# Altium PCB Motherboard_Cube.PcbDoc
Units mil, origin at the board's own origin, x right, y up, seen from the top; angles counter-clockwise.
Board outline 1180 x 1180 mil, 2 copper layers (Top Layer, Bottom Layer); 27 components, 51 nets, 176 pads, 93 vias.
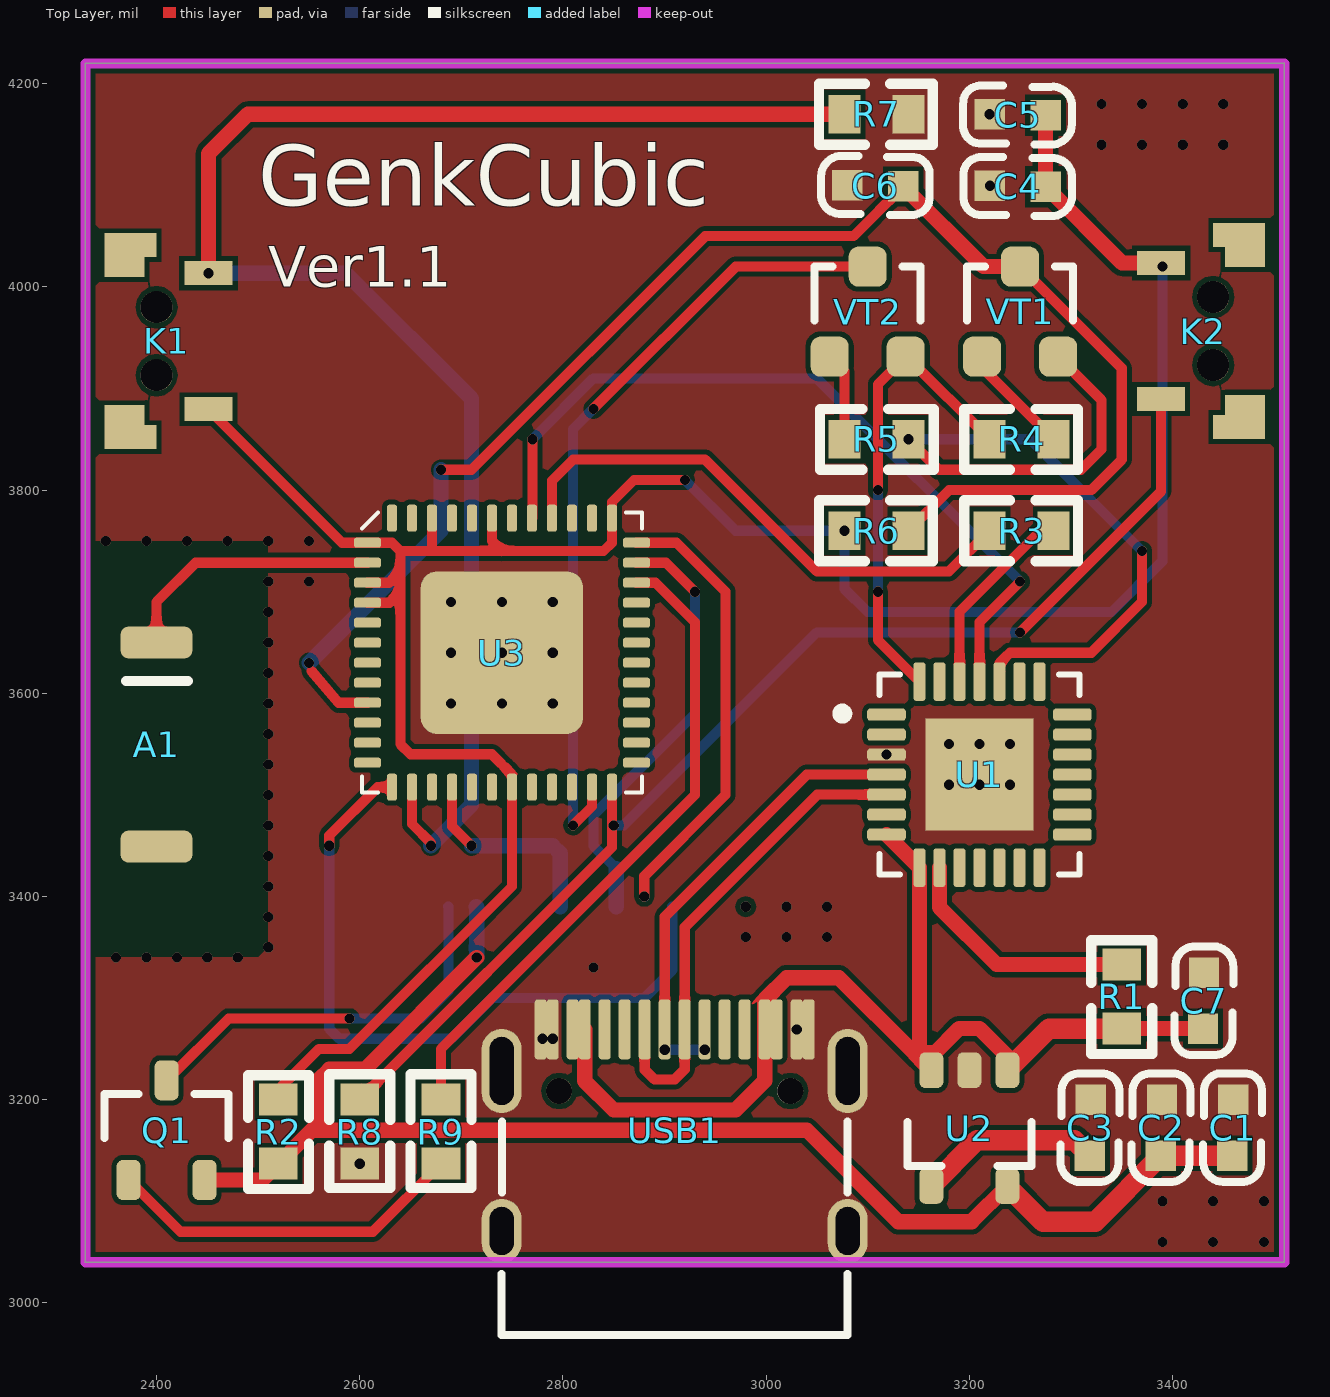
[diagram p0: Top Layer view]
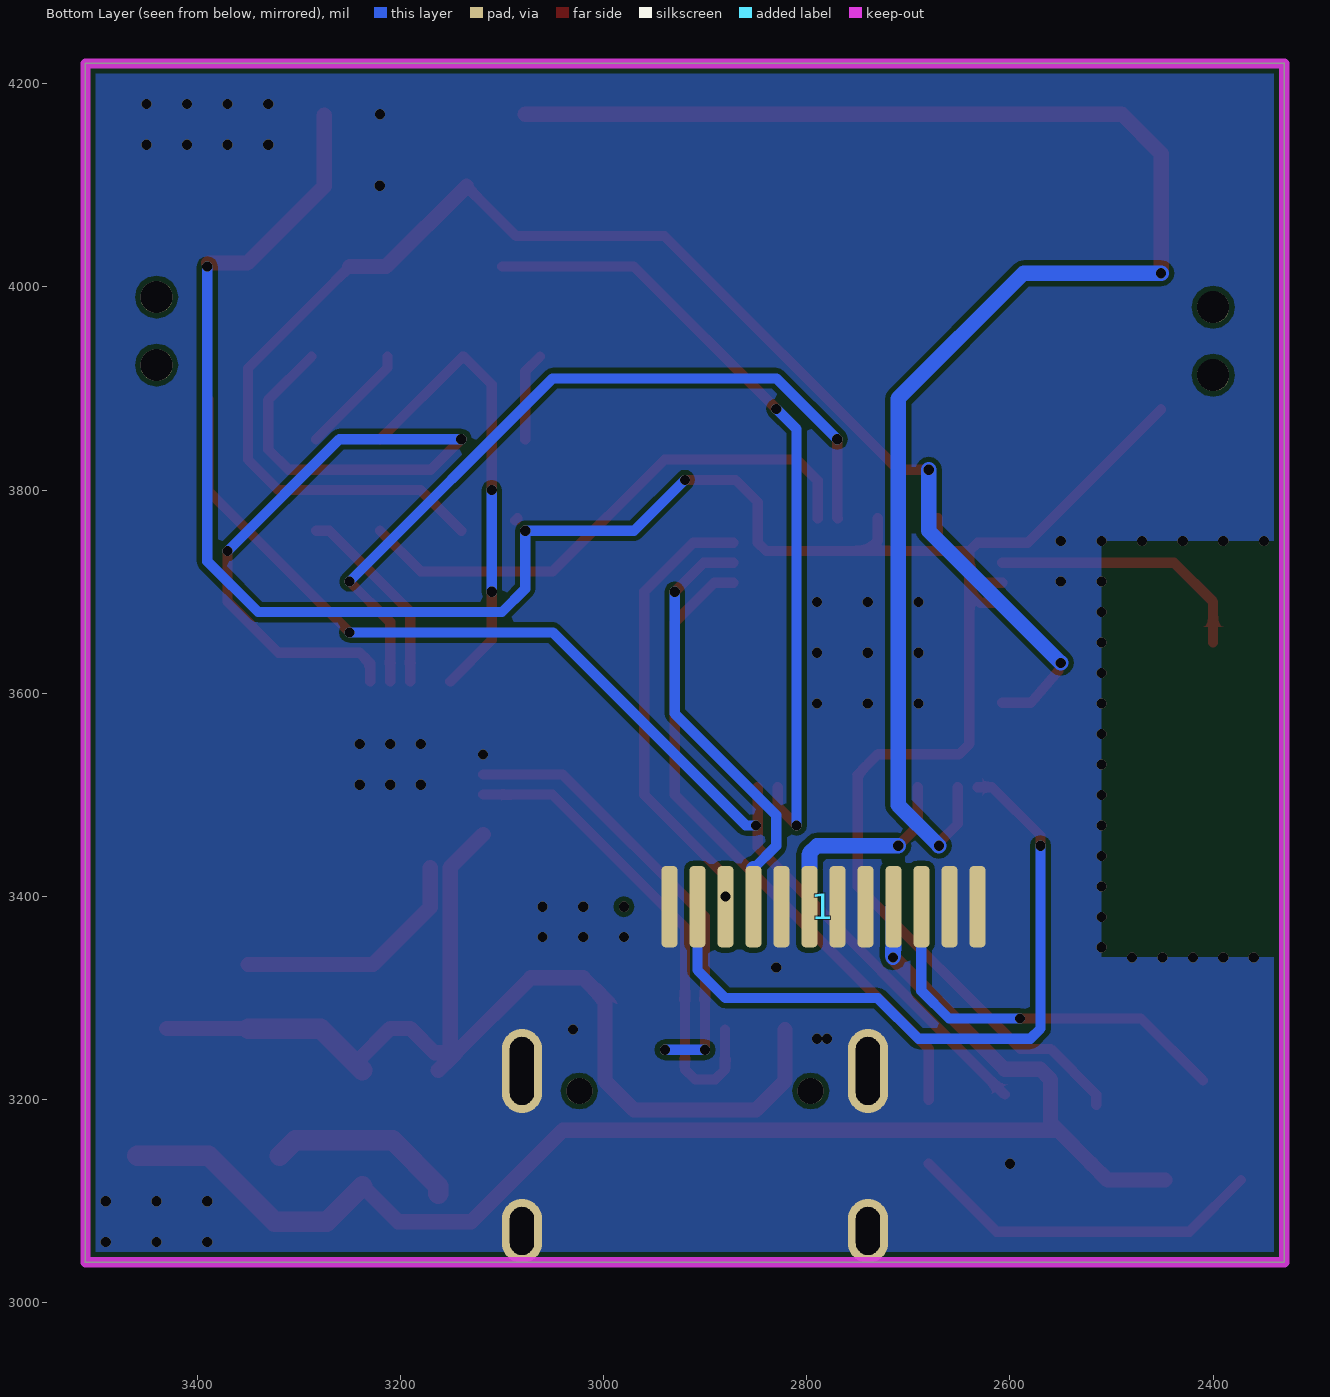
[diagram p1: Bottom Layer view, seen from below]
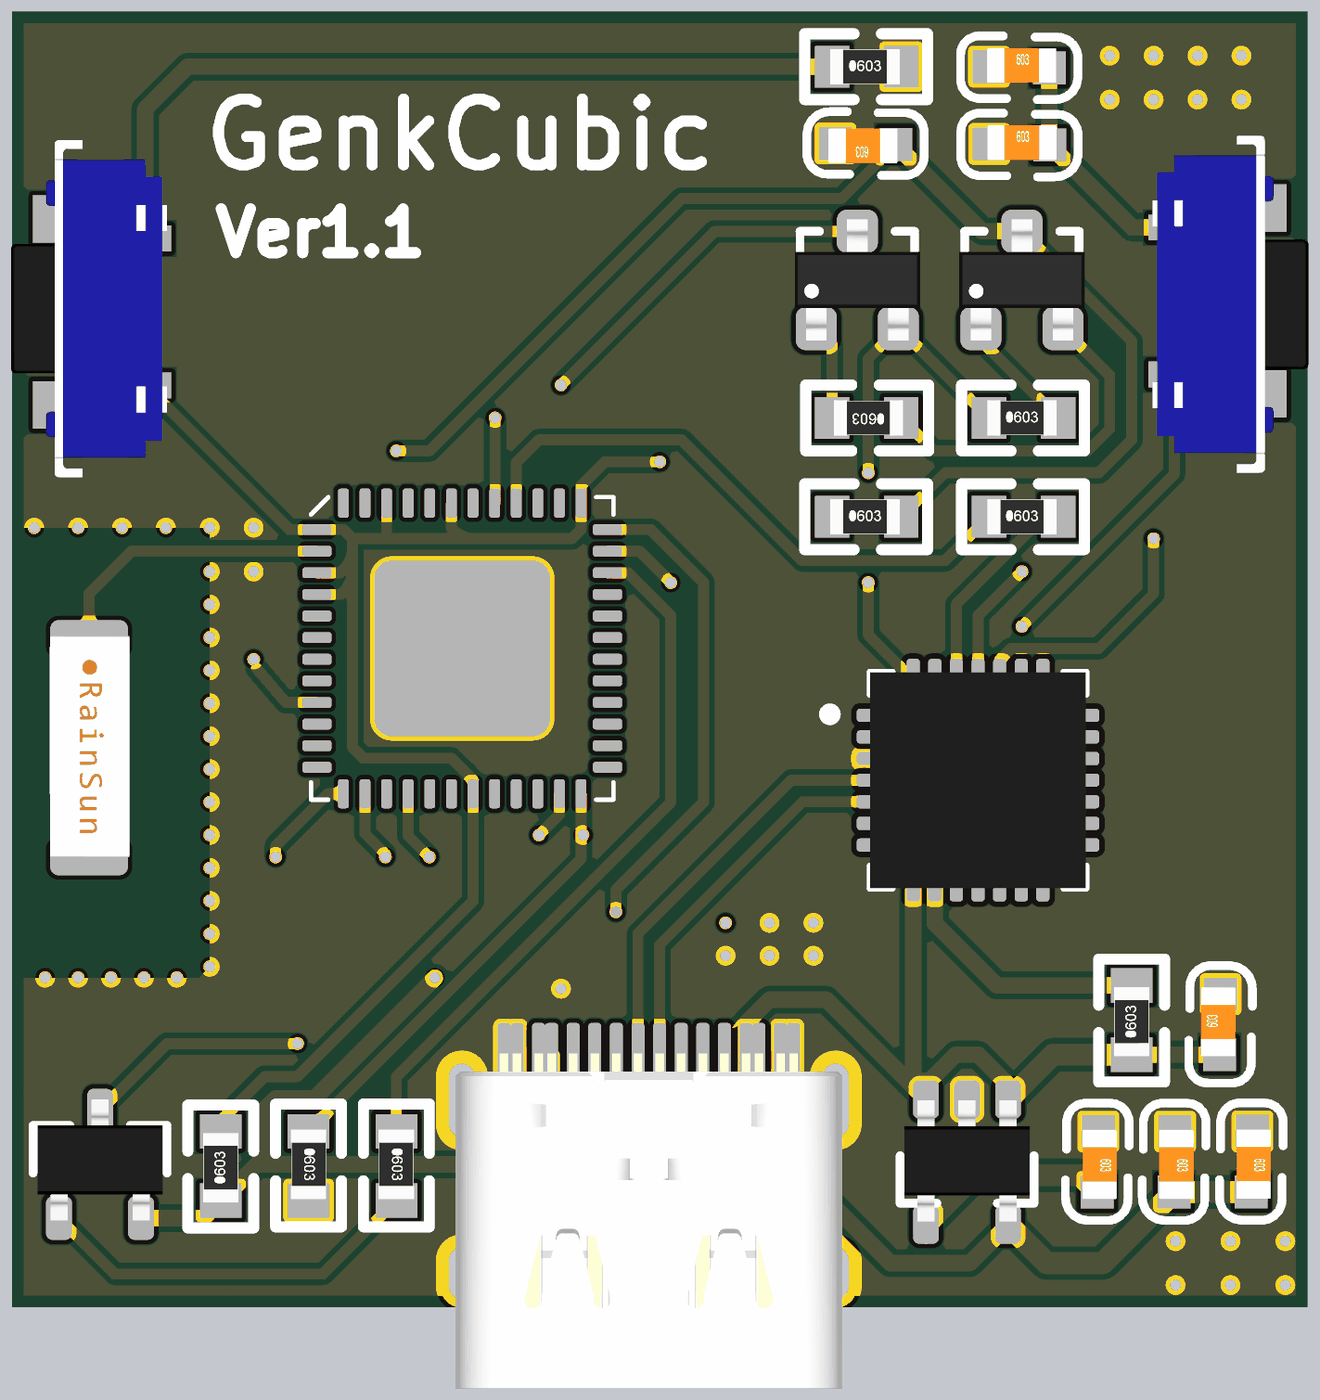
[diagram p2: 3D render of the assembled board from above, using the file's embedded part models]

## Layer stack, top to bottom
Top Solder: solder mask 0.4, Solder Resist, Dk 3.5
Top Layer: signal copper 1.4
Dielectric 1: dielectric 12.6, FR-4, Dk 4.8
Bottom Layer: signal copper 1.4
Bottom Solder: solder mask 0.4, Solder Resist, Dk 3.5

## Board outline
2330,3040 2330,4220 3510,4220 3510,3040

## Design rules (kind name [scope] priority, off if disabled: settings)
Clearance Clearance_12 [InNamedPolygon('Top Layer-No Net') Or  InNamedPolygon('Top Layer-No Net1')] p1: gap=5 ignorepadtopadclearanceinfootprint=FALSE
Clearance Clearance_11 [InNamedPolygon('Top Layer-No Net') Or  InNamedPolygon('Top Layer-No Net1')] p2: gap=5 ignorepadtopadclearanceinfootprint=FALSE
Clearance Clearance_10 [InNamedPolygon('Top Layer-No Net1') Or  InNamedPolygon('Top Layer-No Net')] p3: gap=5 ignorepadtopadclearanceinfootprint=FALSE
Clearance Clearance_9 [InNamedPolygon('Top Layer-No Net') Or  InNamedPolygon('Top Layer-No Net1')] p4: gap=10 ignorepadtopadclearanceinfootprint=FALSE except(0: Arc-Hole Track-Hole SMDPad-Hole THPad-Hole Via-Hole Fill-Hole Poly-Hole Region-Hole Text-Hole)
Clearance Clearance_8 [InNamedPolygon('Top Layer-No Net') Or  InNamedPolygon('Top Layer-No Net1')] p5: gap=10 ignorepadtopadclearanceinfootprint=FALSE except(0: Arc-Hole Track-Hole SMDPad-Hole THPad-Hole Via-Hole Fill-Hole Poly-Hole Region-Hole Text-Hole)
Clearance Clearance_7 [InNamedPolygon('Top Layer-No Net') Or  InNamedPolygon('Top Layer-No Net1')] p6: gap=10 ignorepadtopadclearanceinfootprint=FALSE except(0: Arc-Hole Track-Hole SMDPad-Hole THPad-Hole Via-Hole Fill-Hole Poly-Hole Region-Hole Text-Hole)
Clearance Clearance_6 [InNamedPolygon('Top Layer-No Net1') Or  InNamedPolygon('Top Layer-No Net')] p7: gap=10 ignorepadtopadclearanceinfootprint=FALSE except(0: Arc-Hole Track-Hole SMDPad-Hole THPad-Hole Via-Hole Fill-Hole Poly-Hole Region-Hole Text-Hole)
Clearance Clearance_5 [InNamedPolygon('Top Layer-No Net') Or  InNamedPolygon('Top Layer-No Net1')] p8: gap=10 ignorepadtopadclearanceinfootprint=FALSE except(0: Arc-Hole Track-Hole SMDPad-Hole THPad-Hole Via-Hole Fill-Hole Poly-Hole Region-Hole Text-Hole)
Clearance Clearance_4 [InNamedPolygon('Top Layer-No Net1') Or  InNamedPolygon('Top Layer-No Net')] p9: gap=5 ignorepadtopadclearanceinfootprint=FALSE
Clearance Clearance_3 [InNamedPolygon('Top Layer-No Net')] p10: gap=10 ignorepadtopadclearanceinfootprint=FALSE except(0: Arc-Hole Track-Hole SMDPad-Hole THPad-Hole Via-Hole Fill-Hole Poly-Hole Region-Hole Text-Hole)
Clearance Clearance_2 [InNamedPolygon('Top Layer-No Net1')] p11: gap=10 ignorepadtopadclearanceinfootprint=FALSE except(0: Arc-Hole Track-Hole SMDPad-Hole THPad-Hole Via-Hole Fill-Hole Poly-Hole Region-Hole Text-Hole)
Clearance Clearance_1 [InNamedPolygon('Top Layer-No Net')] p12: gap=5 ignorepadtopadclearanceinfootprint=FALSE
Clearance [All] p13: gap=0 ignorepadtopadclearanceinfootprint=FALSE
PolygonConnect PolygonConnect_6 [All vs IsNamedPolygon('Top Layer-No Net') Or  IsNamedPolygon('Top Layer-No Net1')] p1: connectstyle=Direct reliefconductorwidth=10 reliefentries=4 polygonreliefangle="90 Angle" airgapwidth=10
PolygonConnect PolygonConnect_5 [All vs IsNamedPolygon('Top Layer-No Net') Or  IsNamedPolygon('Top Layer-No Net1')] p2: connectstyle=Direct reliefconductorwidth=10 reliefentries=4 polygonreliefangle="90 Angle" airgapwidth=10
PolygonConnect PolygonConnect_4 [All vs IsNamedPolygon('Top Layer-No Net1') Or  IsNamedPolygon('Top Layer-No Net')] p3: connectstyle=Direct reliefconductorwidth=10 reliefentries=4 polygonreliefangle="90 Angle" airgapwidth=10
PolygonConnect PolygonConnect_3 [All vs IsNamedPolygon('Top Layer-No Net') Or  IsNamedPolygon('Top Layer-No Net1')] p4: thpad.connectstyle=Direct thpad.reliefconductorwidth=10 thpad.reliefentries=4 thpad.polygonreliefangle="90 Angle" thpad.airgapwidth=10 smdpad.connectstyle=Relief smdpad.reliefconductorwidth=10 smdpad.reliefentries=4 smdpad.polygonreliefangle="90 Angle" smdpad.airgapwidth=10 via.connectstyle=Relief via.reliefconductorwidth=10 via.reliefentries=4 via.polygonreliefangle="90 Angle" via.airgapwidth=10
PolygonConnect PolygonConnect_2 [All vs IsNamedPolygon('Top Layer-No Net') Or  IsNamedPolygon('Top Layer-No Net1')] p5: connectstyle=Relief reliefconductorwidth=10 reliefentries=4 polygonreliefangle="90 Angle" airgapwidth=10
PolygonConnect PolygonConnect_1 [All vs IsNamedPolygon('Top Layer-No Net1') Or  IsNamedPolygon('Top Layer-No Net')] p6: connectstyle=Relief reliefconductorwidth=10 reliefentries=4 polygonreliefangle="90 Angle" airgapwidth=10
PolygonConnect [All] p7: connectstyle=Relief reliefconductorwidth=10 reliefentries=4 polygonreliefangle="90 Angle" airgapwidth=10
RoutingVias [All] p1: holewidth=28 width=50 viastyle="Through Hole" minholewidth=28 minwidth=50 maxholewidth=28 maxwidth=50
SolderMaskExpansion [All] p1: expansion=4
UnRoutedNet [All] p1: checkbadconnections=TRUE
Width [All] p1: maxlimit=30 minlimit=1 preferedwidth=15
29 further rules are at their usual default settings.

## Components (designator, comment, footprint, x,y, rotation, side; value= is the part's Value field where it differs from the comment)
1 "LCD-240x240" LCD-240X240-NOHOLE 2913.97,3597 r180 bottom
A1 "RAINSUN" ANT-Rainsun-AN5120 2400,3550 r270 top
C1 "0.1uF" 0603C 3460.35,3200.21 r270 top value=0.1u
C2 "10uF" 0603C 3390,3200 r270 top value=0.1u
C3 "10nF" 0603C 3320,3200 r270 top value=0.1u
C4 "10uF" 0603C 3220,4100 r0 top value=0.1u
C5 "0.1uF" 0603C 3219.79,4170.35 r0 top value=0.1u
C6 "0.1uF" 0603C 3135.21,4098.65 r180 top value=0.1u
C7 "1uF" 0603C 3429.65,3269.79 r90 top value=0.1u
K1 "KEY_LEFT" SMD-SW2X4 2400,3913.07 r90 top
K2 "KEY_RIGHT" SMD-SW2X4 3440,3990 r270 top
Q1 "AO3415A" SOT23-3 2410,3170 r90 top
R1 "10K" 0603R 3350,3270 r90 top value=22R
R2 "0R" 0603R 2520,3137.01 r90 top value=22R
R3 "200R" 0603R 3220,3760 r0 top value=22R
R4 "12K" 0603R 3220,3850 r0 top value=22R
R5 "12K" 0603R 3140,3850 r180 top value=22R
R6 "10K" 0603R 3077.01,3760 r0 top value=22R
R7 "10K" 0603R 3077.01,4170 r0 top value=22R
R8 "10K" 0603R 2600,3200 r270 top value=22R
R9 "1K" 0603R 2680,3200 r270 top value=22R
U1 "CP2102" QFN-28 3210,3520 r0 top value=Value
U2 "LP2992 3V3" SOT23-5 3200,3170 r270 top
U3 "ESP32_SIP" QFN-48_7X7 2740,3640 r0 top
USB1 "Type-C" Type-C-TOP 2910,3170 r270 top
VT1 "S8050" SMT_TRIODE_NPN 3250,3975.71 r0 top
VT2 "S8050" SMT_TRIODE_NPN 3100,3975.71 r0 top

## Footprints (in the part's own frame and the unit in brackets; to place one, negate y for a bottom-side part, rotate by r counter-clockwise, add the part's x,y. Pads: shape width x height; smd on the part's side, far side on the other; paste and mask are expansions set on the pad)
0603C [mil]
  rect 30x30 smd: 1(0.21,-0.35) 2(55.21,-1.35)
  silkscreen extent -26,-30 81,28, body extent -1,-15 62,17, height 12
0603R [mm]
  rect 0.8x0.965 smd: 1(0,0) 2(1.6,0)
  silkscreen extent -0.64,-0.76 2.21,0.76, body extent -0.04,-0.41 1.56,0.41, height 0.45
ANT-Rainsun-AN5120 [mm] "选择焊盘"
  rrect50% 0.8x1.8 smd: 1(-2.54,0) ""(2.563,0)
  silkscreen extent -1.57,-0.76 -1.57,0.79, body extent -2.57,-0.91 2.54,0.94, height 1.32
LCD-240X240-NOHOLE [mil]
  rrect50% 15.75x80 smd: 1(282,-207) 2(254.44,-207) 3(226.88,-207) 4(199.32,-207) 5(171.76,-207) 6(144.2,-207) 7(116.65,-207) 8(89.09,-207) 9(61.53,-207) 10(33.97,-207) 11(6.41,-207) 12(-21.15,-207)
QFN-28 [mil]
  rrect50% 38x12 smd mask+5: 1(-91.5,59.06) 2(-91.5,39.37) 3(-91.5,19.68) 4(-91.5,0) 5(-91.5,-19.68) 6(-91.5,-39.37) 7(-91.5,-59.06) 15(91.5,-59.06) 16(91.5,-39.37) 17(91.5,-19.68) 18(91.5,0) 19(91.5,19.68) 20(91.5,39.37) 21(91.5,59.06)
  rrect50% 12x38 smd mask+5: 8(-59.06,-91.5) 9(-39.37,-91.5) 10(-19.68,-91.5) 11(0,-91.5) 12(19.68,-91.5) 13(39.37,-91.5) 14(59.06,-91.5) 22(59.06,91.5) 23(39.37,91.5) 24(19.68,91.5) 25(0,91.5) 26(-19.68,91.5) 27(-39.37,91.5) 28(-59.06,91.5)
  rect 106.3x110.24 smd: 29(0,0)
  silkscreen extent -140,-98 98,98, body extent -98,-98 98,98, height 35
QFN-48_7X7 [mm]
  rrect20% 4.064x4.064 smd: 0(0,0)
  rrect50% 0.675x0.25 smd: 1(-3.363,2.75) 2(-3.363,2.25) 3(-3.363,1.75) 4(-3.363,1.25) 5(-3.363,0.75) 6(-3.363,0.25) 7(-3.363,-0.25) 8(-3.363,-0.75) 9(-3.363,-1.25) 10(-3.363,-1.75) 11(-3.363,-2.25) 12(-3.363,-2.75) 25(3.363,-2.75) 26(3.363,-2.25) 27(3.363,-1.75) 28(3.363,-1.25) 29(3.363,-0.75) 30(3.363,-0.25) 31(3.363,0.25) 32(3.363,0.75) 33(3.363,1.25) 34(3.363,1.75) 35(3.363,2.25) 36(3.363,2.75)
  rrect50% 0.25x0.675 smd: 13(-2.75,-3.363) 14(-2.25,-3.363) 15(-1.75,-3.363) 16(-1.25,-3.363) 17(-0.75,-3.363) 18(-0.25,-3.363) 19(0.25,-3.363) 20(0.75,-3.363) 21(1.25,-3.363) 22(1.75,-3.363) 23(2.25,-3.363) 24(2.75,-3.363) 37(2.75,3.363) 38(2.25,3.363) 39(1.75,3.363) 40(1.25,3.363) 41(0.75,3.363) 42(0.25,3.363) 43(-0.25,3.363) 44(-0.75,3.363) 45(-1.25,3.363) 46(-1.75,3.363) 47(-2.25,3.363) 48(-2.75,3.363)
  silkscreen extent -3.5,-3.5 3.5,3.5, body extent -3.5,-3.5 3.5,3.5, height 1
SMD-SW2X4 [mm]
  rect 0.6x1.3 smd: 0(-1.55,0.65) 0(3.25,0.65)
  rect 0.6x1 smd: 0(-1.05,0.8) 0(2.75,0.8)
  round 0.8 hole 0.8: 0(0,0) 0(1.7,0)
  rect 0.6x1.2 smd: 1(-0.85,-1.3) 3(2.55,-1.3)
  body extent -2.97,-1.8 4.83,1.8, height 3.5
SMT_TRIODE_NPN [mm] "Surface mount NPN transistor, package SOT-23"
  rrect50% 0.95x1 smd: 1(-0.95,-1.125) 2(0.95,-1.125) 3(0,1.125)
  silkscreen extent -1.33,-0.22 1.32,1.13, body extent -1.45,-1.4 1.45,1.4, height 1.3
SOT23-3 [mm] "SOT23, 3-Leads, Body 3.1x3.0mm (max), Pitch 0.95mm, IPC Medium Density"
  rrect50% 1x0.6 smd: 1(-1.246,0.95) 2(-1.246,-0.95) 3(1.246,0)
  silkscreen extent -0.2,-1.55 0.9,1.55, body extent -1.3,-1.45 1.5,1.45, height 1.2
SOT23-5 [mm] "SOT23, 3-Leads, Body 3.1x3.0mm (max), Pitch 0.95mm, IPC Medium Density"
  rrect50% 0.889x0.6 smd: 1(-1.5,0.95) 2(-1.5,0) 3(-1.5,-0.95) 4(1.396,-0.95) 5(1.396,0.95)
  silkscreen extent -0.2,-1.55 0.9,1.55, body extent -1.48,-1.45 1.32,1.45, height 1.2
Type-C-TOP [mm]
  round 0.65 hole 0.65: 0(-0.98,2.89) 0(-0.98,-2.89)
  oval 1.6x1 hole 0.6 slot 1.2 at 0 deg: 1(2.52,4.325) 2(2.52,-4.325)
  oval 2.1x1 hole 0.6 slot 1.7 at 0 deg: 3(-1.48,-4.325) 4(-1.48,4.325)
  rrect50% 1.5x0.3 smd: A1(-2.52,-3.35) A4(-2.52,-2.55) A5(-2.52,-1.25) A6(-2.52,-0.25) A7(-2.52,0.25) A8(-2.52,1.25) A9(-2.52,2.55) A12(-2.52,3.35) B1(-2.52,3.05) B4(-2.52,2.25) B5(-2.52,1.75) B6(-2.52,0.75) B7(-2.52,-0.75) B8(-2.52,-1.75) B9(-2.52,-2.25) B12(-2.52,-3.05)
  silkscreen extent -0.22,-4.33 5.12,4.33, body extent -2.57,-4.48 5.18,4.48, height 3.26

## Part data
1: "显示屏"
A1: library part ANT-Rainsun-AP5120
C1 C2 C3 C4 C5 C6 C7: library part 电容-0402, "Capacitor"
K1 K2: library part KEY
Q1: "MOSFET", LatestRevisionDate=17-Jul-2002, LatestRevisionNote="Re-released for DXP Platform.", PackageDescription="TO, Flat Index; 3 In-Line, Axial Leads; Body Dia. 4.6mm; Lead Dia. 0.5 mm (max)", PackageReference=E3, PackageVersion=1995/1996, Published=8-Jun-2000, Publisher="Altium Limited"
R1 R2 R3 R4 R5 R6 R7 R8 R9: library part 电阻-0402, "Resistor"
U1: "USBתTTL", MFG #1="SILICON LABS", PART DESC="SINGLE-CHIP USB TO UART BRIDGE, QFN28, RoHS.", PART NUMBER=CP2102, RefDes=RefDes, Type=DEV
U2: library part LP2992, "LDO"
U3: library part ESP32-PICO
USB1: library part USB-Type-C-TOP
VT1 VT2: library part SMT_TRIODE_NPN, "Surface mount NPN transistor, package SOT-23"

## Via types
v1: diameter 10, hole 10, Top Layer to Bottom Layer, 93 vias

## Nets (pads, with @x,y where several pads share a name; then routed paths per layer and width w, separated by ;. In a path a pad name is that pad's centre, name@x,y a point inside that pad or via, vN(x,y) a via of type N, cw(c..) or ccw(c..) an arc to the next point about the centre after c; other vN are vias at no path point)
3V3: 1.4 C1.2 C2.2 Q1.2 R2.1 U2.5 | length 1433.1
  Top Layer w15: Q1.2 2503.94,3120.94 R2.1 2552.99,3170 ; v1(2715.12,3340) 2605.12,3230 2570,3230 2560,3220 2560,3177.01 2552.99,3170 ; U2.5 3202.35,3080 3130,3080 3040,3170 2552.99,3170
  Top Layer w20: U2.5 3272.46,3080 3323.86,3080 C2.2 3458.79,3144.79 C1.2
  Bottom Layer w15: 1.4 2715.12,3389.53 v1(2715.12,3340)
3V3A: C4.2 C5.2 K1.1 K2.1 R2.2 R6.1 U3.1 U3.3 U3.4 U3.19 U3.37 U3.43 U3.46 | length 2560.9
  Top Layer w10: K1.1 2582.52,3748.27 U3.1 2631.73,3748.27 2640,3740 ; R2.2@2515,3195 2515,3205 2560,3250 2590,3250 2749.84,3409.84 U3.19 2749.84,3520.16 2730,3540 2650,3540 2640,3550 2640,3700 ; U3.4 2629.21,3689.21 2640,3700 ; U3.3 2628.9,3708.9 2640,3720 ; U3.46 2671.1,3741.1 2670,3740 ; U3.43 2730.16,3749.84 2740,3740 ; v1(2920,3810) 2870,3810 2848.27,3788.27 U3.37 2848.27,3748.27 2840,3740 2740,3740 ; R6.1@3084.63,3772.38 R6.1@3087.01,3770 ; 2640,3700 2640,3720 ; 2640,3720 2640,3740 ; 2640,3740 2670,3740 ; 2670,3740 2740,3740
  Top Layer w15: C5.2 3275,4098.86 C4.2 3350.39,4023.46 K2.1
  Bottom Layer w10: v1(2920,3810) 2970,3760 v1(3077.01,3760) 3077.01,3702.99 3100,3680 3340,3680 3390,3730 v1(3390,4020)
CP_Rx: U1.25 U3.41 | length 780.6
  Top Layer w10: U3.41 2770,3772.85 v1(2770,3850) ; U1.25 3210,3670 v1(3250,3710)
  Bottom Layer w10: v1(2770,3850) 2830,3910 3050,3910 v1(3250,3710)
CP_Tx: R3.1 U3.40 | length 538.4
  Top Layer w10: U3.40 2789.21,3809.21 2810,3830 2940,3830 3050,3720 3180,3720 R3.1
DC: 1.7 U3.16 | length 208.6
  Top Layer w10: U3.16 2690.79,3469.21 v1(2710,3450)
  Bottom Layer w15: v1(2710,3450) 2790,3450 2797.32,3442.68 1.7
DTR: R4.1 U1.28 VT2.2 | length 464.5
  Top Layer w10: v1(3110,3700) 3110,3652.44 U1.28 ; v1(3110,3800) 3110,3904.02 VT2.2 3138.58,3931.42 R4.1
  Bottom Layer w10: v1(3110,3700) v1(3110,3800)
EN: C6.1 R6.2 U3.9 VT1.3 | length 1502.1
  Top Layer w10: 2552.44,3622.08 2579.21,3590.79 U3.9 ; v1(2680,3820) 2710,3820 2940,4050 3086,4050 C6.1 ; R6.2 3180,3800 3320,3800 3350,3830 3350,3920 VT1.3
  Top Layer w15: C6.1 3214,4020 VT1.3
  Bottom Layer w15: v1(2550,3630) 2680,3760 v1(2680,3820)
FLASH_CLK: U3.31
FLASH_CS: U3.25
FLASH_SD0: U3.27
FLASH_SD1: U3.33
FLASH_SD2: U3.30
FLASH_SD3: U3.32
GND: 1.1 1.2 1.5 1.6 1.8 1.12 C1.1 C2.1 C3.1 C4.1 C5.1 C6.2 C7.2 R7.2 R8.2 U1.3 U1.29 U2.2 U3.0 USB1.1 USB1.2 USB1.3 USB1.4 USB1.A1 USB1.A12 USB1.B1 USB1.B12
  other v1: 3390,3060 3440,3060 3490,3060 3390,3100 3440,3100 3490,3100 2600,3137.01 2780,3260 2790,3260 3030.08,3269.21 2830,3330 2360,3340 2390,3340 2420,3340 2450,3340 2480,3340 2510,3350 2980,3360 3020,3360 3060,3360 2510,3380 3020,3390 3060,3390 2510,3410 2510,3440 2510,3470 2510,3500 3180,3510 3210,3510 3240,3510 2510,3530 3118.5,3539.68 3180,3550 3210,3550 3240,3550 2510,3560 2510,3590 2690,3590 2740,3590 2790,3590 2510,3620 2690,3640 2740,3640 2790,3640 2510,3650 2510,3680 2690,3690 2740,3690 2790,3690 2510,3710 2550,3710 2350,3750 2390,3750 2430,3750 2470,3750 2510,3750 2550,3750 3220.21,4099.65 3330,4140 3370,4140 3410,4140 3450,4140 3220,4170 3330,4180 3370,4180 3410,4180 3450,4180
GPIO0: U3.23 VT2.3 | length 791.6
  Top Layer w10: v1(2810,3470) 2828.58,3488.58 U3.23 ; v1(2830,3880) 2970,4020 VT2.3
  Bottom Layer w10: v1(2810,3470) 2810,3860 v1(2830,3880)
GPIO2: U3.22
GPIO4: K2.3 R8.1 U3.24 | length 1169.2
  Top Layer w10: R8.1@2605,3205 2848.27,3448.27 U3.24 ; v1(3250,3660) 3388.82,3798.82 K2.3
  Bottom Layer w10: v1(2850,3470) 2860,3470 3050,3660 v1(3250,3660)
GPIO5: R9.1 U3.34 | length 647.3
  Top Layer w10: R9.1 2680,3250 2930,3500 2930,3670 2891.1,3708.9 U3.34
GPIO9: U3.28
GPIO10: U3.29
GPIO12: U3.18
GPIO13: U3.20
GPIO14: U3.17
GPIO15: U3.21
GPIO18: 1.9 U3.35 | length 430.2
  Top Layer w10: U3.35 2901.42,3728.58 v1(2930,3700)
  Bottom Layer w10: 1.9@2852.44,3427.56 2830,3450 2830,3480 2930,3580 v1(2930,3700)
  Bottom Layer w15: 1.9 1.9@2852.44,3427.56
GPIO19: U3.38
GPIO21: U3.42
GPIO22: U3.39
GPIO23: 1.10 U3.36 | length 441.1
  Top Layer w10: U3.36 2911.73,3748.27 2960,3700 2960,3500 2880,3420 v1(2880,3400)
  Bottom Layer w10: v1(2880,3400) 1.10@2880.24,3399.76
GPIO25: K1.3 R7.1 U3.14 | length 1591.5
  Top Layer w10: U3.14 2651.42,3471.42 2670,3452.83 v1(2670,3450)
  Top Layer w15: v1(2451.18,4013.46) 2451.18,4131.18 2490,4170 R7.1
  Bottom Layer w15: v1(2451.18,4013.46) 2586.54,4013.46 2710,3890 2710,3490 v1(2670,3450)
GPIO26: U3.15
GPIO32: U3.12
GPIO33: 1.11 U3.13 | length 703.6
  Top Layer w10: v1(2570,3450) 2570,3460 2617.62,3507.62 U3.13
  Bottom Layer w10: v1(2570,3450) 2570,3270 2580,3260 2690,3260 2730,3300 2880,3300 2907.56,3327.56 1.11
GPIO34: U3.10
GPIO35: U3.11
GPIO37: U3.6
GPIO38: U3.7
LCD_BL_VCC: 1.3 Q1.3 | length 396.7
  Top Layer w10: Q1.3 2470.94,3280 v1(2590,3280)
  Bottom Layer w10: v1(2590,3280) 2660,3280 2687.32,3307.32 2687.32,3389.76 1.3
NetA1_1: A1.1 U3.2 | length 263.6
  Top Layer w10: A1.1 2400,3690 2438.58,3728.58 U3.2
NetC3_2: C3.2 U2.4 | length 188.6
  Top Layer w20: U2.4@3162.6,3107.4 U2.4 3207.54,3160 3303.43,3160 C3.2
NetQ1_1: Q1.1 R9.2 | length 356.3
  Top Layer w10: Q1.1 2423.54,3070 2612.99,3070 R9.2
NetR1_2: R1.2 U1.9 | length 241.9
  Top Layer w15: U1.9 3170.63,3389.37 3227.01,3332.99 R1.2
NetR3_2: R3.2 U1.26 | length 194.5
  Top Layer w10: U1.26 3190.32,3680.32 3270,3760 R3.2
NetR4_2: R4.2 VT1.1 | length 110.6
  Top Layer w10: VT1.1 3212.6,3920.39 R4.2
NetR5_2: R5.2 VT2.1 | length 87.4
  Top Layer w10: VT2.1 3077.01,3917.01 R5.2
RTS: R5.1 U1.24 VT1.2 | length 828.8
  Top Layer w10: v1(3140,3850) 3170,3820 3310,3820 3330,3840 3330,3888.82 VT1.2 ; U1.24 3229.68,3629.68 3240,3640 3320,3640 3370,3690 v1(3370,3740)
  Bottom Layer w10: v1(3140,3850) 3260,3850 v1(3370,3740)
SENSOR_VN: U3.8
SENSOR_VP: U3.5
USB-PWR-DM: U1.5 USB1.A7 USB1.B7 | length 479.9
  Top Layer w10: USB1.B7 2880.47,3229.53 2890,3220 2910,3220 2920,3230 2920,3269.05 USB1.A7 2919.84,3369.84 3050.32,3500.32 U1.5
USB-PWR-DP: U1.4 USB1.A6 USB1.B6 | length 446.6
  Top Layer w10: v1(2900.16,3249.21) 2900.16,3380.16 3040,3520 U1.4
  Bottom Layer w10: v1(2900.16,3249.21) v1(2939.53,3249.21)
VDD_5V: C7.1 R1.1 U1.7 U1.8 U2.1 U2.3 USB1.A4 USB1.A9 USB1.B4 USB1.B9 | length 1102.1
  Top Layer w15: USB1.B9 2821.42,3218.58 2850,3190 2970,3190 2998.58,3218.58 USB1.B4 2998.58,3298.58 3020,3320 3071.65,3320 3145.45,3246.2 ; U1.7 U1.8 3150.94,3246.2 ; U2.3 U2.3@3150.94,3240.71 ; U2.1@3240,3240 3210,3270 3190,3270 3166.2,3246.2 3150.94,3246.2 ; R1.1 C7.1 ; 3145.45,3246.2 3150.94,3246.2 ; 3145.45,3246.2 U2.3@3150.94,3240.71 ; U2.3@3150.94,3240.71 3150.94,3246.2
  Top Layer w20: U2.1 3278.35,3270 R1.1
pads on no net: A1. K1.0 K2.0 U1.1 U1.2 U1.6 U1.10 U1.11 U1.12 U1.13 U1.14 U1.15 U1.16 U1.17 U1.18 U1.19 U1.20 U1.21 U1.22 U1.23 U1.27 U3.26 U3.44 U3.45 U3.47 U3.48 USB1.0 USB1.A5 USB1.A8 USB1.B5 USB1.B8
copper on no net:
  other v1: 2980,3390

## Polygon pours and split planes (outlines as drawn)
GND on Top Layer "Top Layer-No Net" (solid, pour order 12): 2330,3040 2330,4220 3510,4220 3510,3040
GND on Bottom Layer "Top Layer-No Net1" (solid, pour order 13): 2330,3040 2330,4220 3510,4220 3510,3040

## Keep-outs
Keep-Out Layer:
  the board outline again, w10

## Other copper
Top Layer:
  pour cut-out: 2330,3750 2510,3750 2510,3350 2500,3340 2330,3340
Bottom Layer:
  pour cut-out: 2510,3750 2510,3340 2330,3340 2330,3750

## Silkscreen, mask and mechanical layers (free items; w line width, h text height)
Top Overlay:
  text "GenkCubic" at 2500,4080 h60
  text "Ver1.1" at 2510,4000 h40